# EAGLE board sonda7 (EAGLE 4.16)
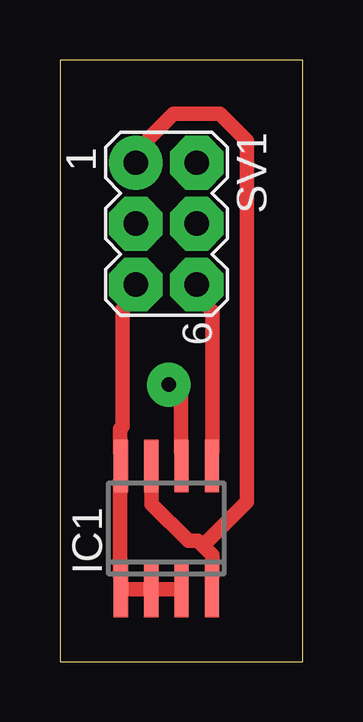
[diagram p0: board, top side]
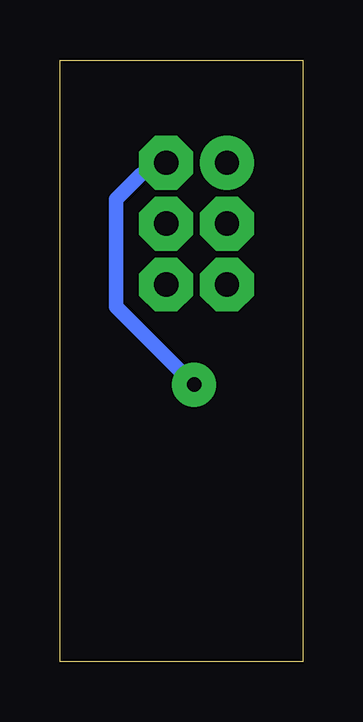
[diagram p1: board, bottom side, seen from below]

Size 10.14 x 25.07 mm. Coordinates in mm from the lower left corner, seen from the top.
Outline: 0,0 10.14,0 10.14,25.07 0,25.07 0,0
Copper layers (1*16): Top 0.035mm / dielectric 1.5mm / Bottom 0.035mm
Design rules "mio2": minimum track width 24mil, minimum drill 24mil, track to track 24mil, track to pad 24mil, pad to pad 24mil, via to via 24mil, smd to smd 24mil, copper to edge 40mil, drill to drill 8mil, minimum pad ring 24mil, minimum via ring 24mil, stop-mask expansion 4mil, vias tented up to drill 0mil, thermal gap 10mil

## Footprints (pad centres in the part's own frame; a part is rotated, then mirrored left to right if it is on the bottom)
SO-08 = smd 0.6 x 2.2: 1 -1.905,-2.6; 2 -0.635,-2.6; 3 0.635,-2.6; 4 1.905,-2.6; 5 1.905,2.6; 6 0.635,2.6; 7 -0.635,2.6; 8 -1.905,2.6
MA03-2 = drill 1.016 round: 1 -2.54,-1.27 | drill 1.016 octagon: 2 -2.54,1.27; 3 0,-1.27; 4 0,1.27; 5 2.54,-1.27; 6 2.54,1.27

## Placement (x,y rotation side)
IC1  24LC16BSN  [SO-08]  4.44,5.55 0 top
SV1  [MA03-2]  4.44,18.25 270 top
U$1  [A4P-LOC]  -73.03,-125.26 0 top  (outside the outline)

## Library data of the parts
IC1 = microchip
SV1 = con-lstb
U$1 = frames

## Nets
GND: IC1.4 IC1.7 SV1.1
N$1: IC1.6 SV1.2
N$2: IC1.5 SV1.6
VCC: IC1.1 IC1.2 IC1.3 IC1.8 SV1.5

## Tracks (layer width: path | path; a pad name or v marks a point on that pad's centre or on a via)
GND
  Top 0.61: 5.96,4.84 6.37,4.43 6.37,4.03 IC1.4 | 5.96,4.84 5.76,5.04 5.35,5.04 3.83,6.57 3.83,7.07 IC1.7 | SV1.1 3.73,21.81 4.74,22.82 6.68,22.82 7.79,21.7 7.79,6.67 5.96,4.84
N$1  (via drill 0.61)
  Top 0.61: v4.54,11.54 5.05,11.04 5.05,9.21 IC1.6
  Bottom 0.61: v4.54,11.54 7.79,14.8 7.79,19.27 6.78,20.28 SV1.2
N$2
  Top 0.61: IC1.5 6.37,9.21 6.37,14.59 6.27,14.69 SV1.6
VCC
  Top 0.61: IC1.3 4.85,3.01 4.03,3.01 IC1.2 3.53,3.01 2.81,3.01 IC1.1 2.51,4.03 2.51,7.07 IC1.8 2.51,9.21 2.51,9.72 2.61,9.82 2.61,14.69 SV1.5

## Text on the board
Pads: farla single layer e saldare i fili sul vias anzichè sul connettore | www.pyacqua.net